# Altium PCB PCB2.PcbDoc
Units mm, origin at the board's own origin, x right, y up, seen from the top; angles counter-clockwise.
Board outline 75 x 68.33 mm, 2 copper layers (Top Layer, Bottom Layer); 27 components, 26 nets, 98 pads, 7 vias.
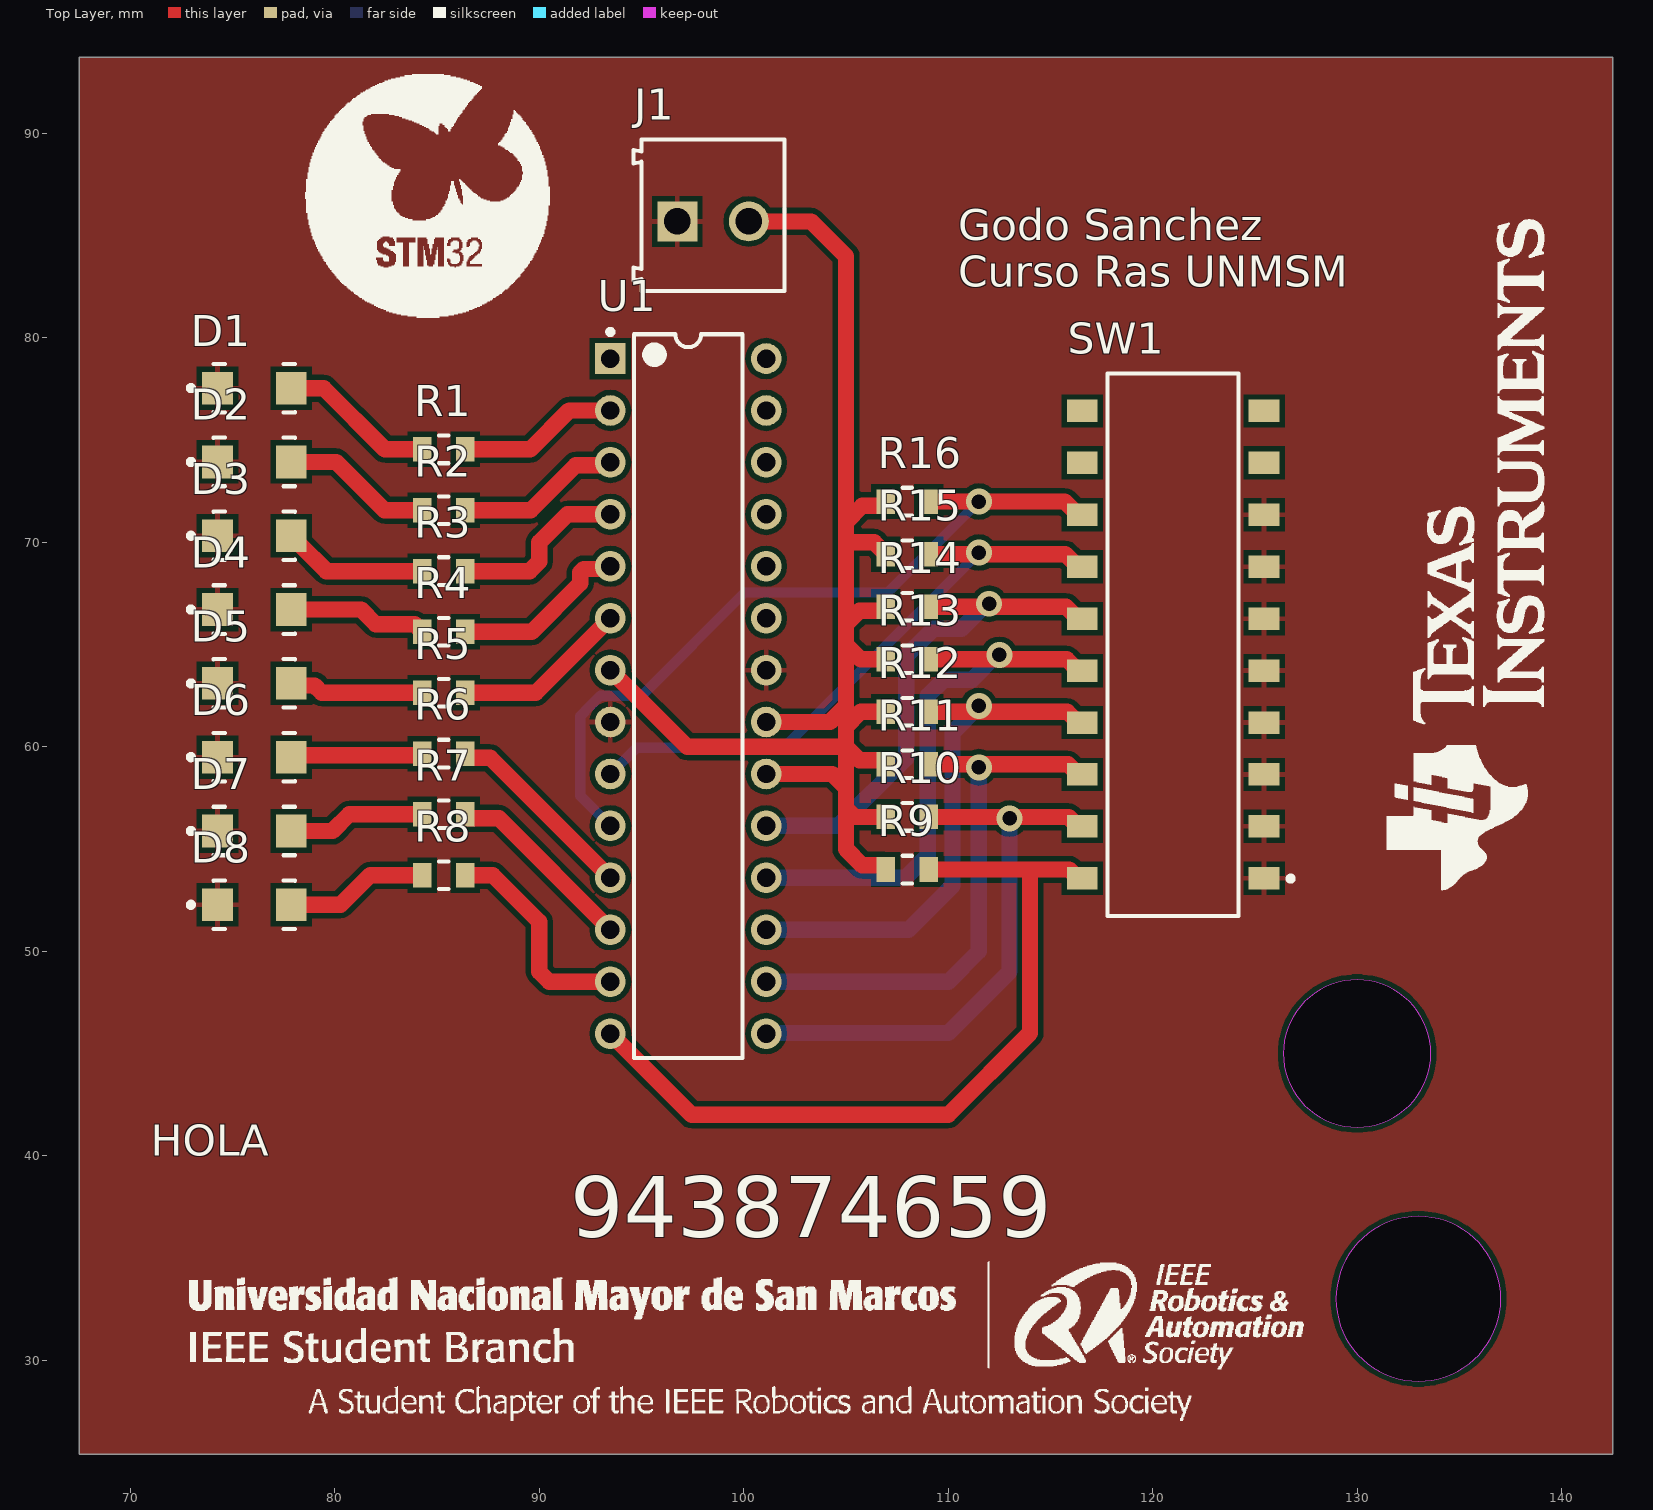
[diagram p0: Top Layer view]
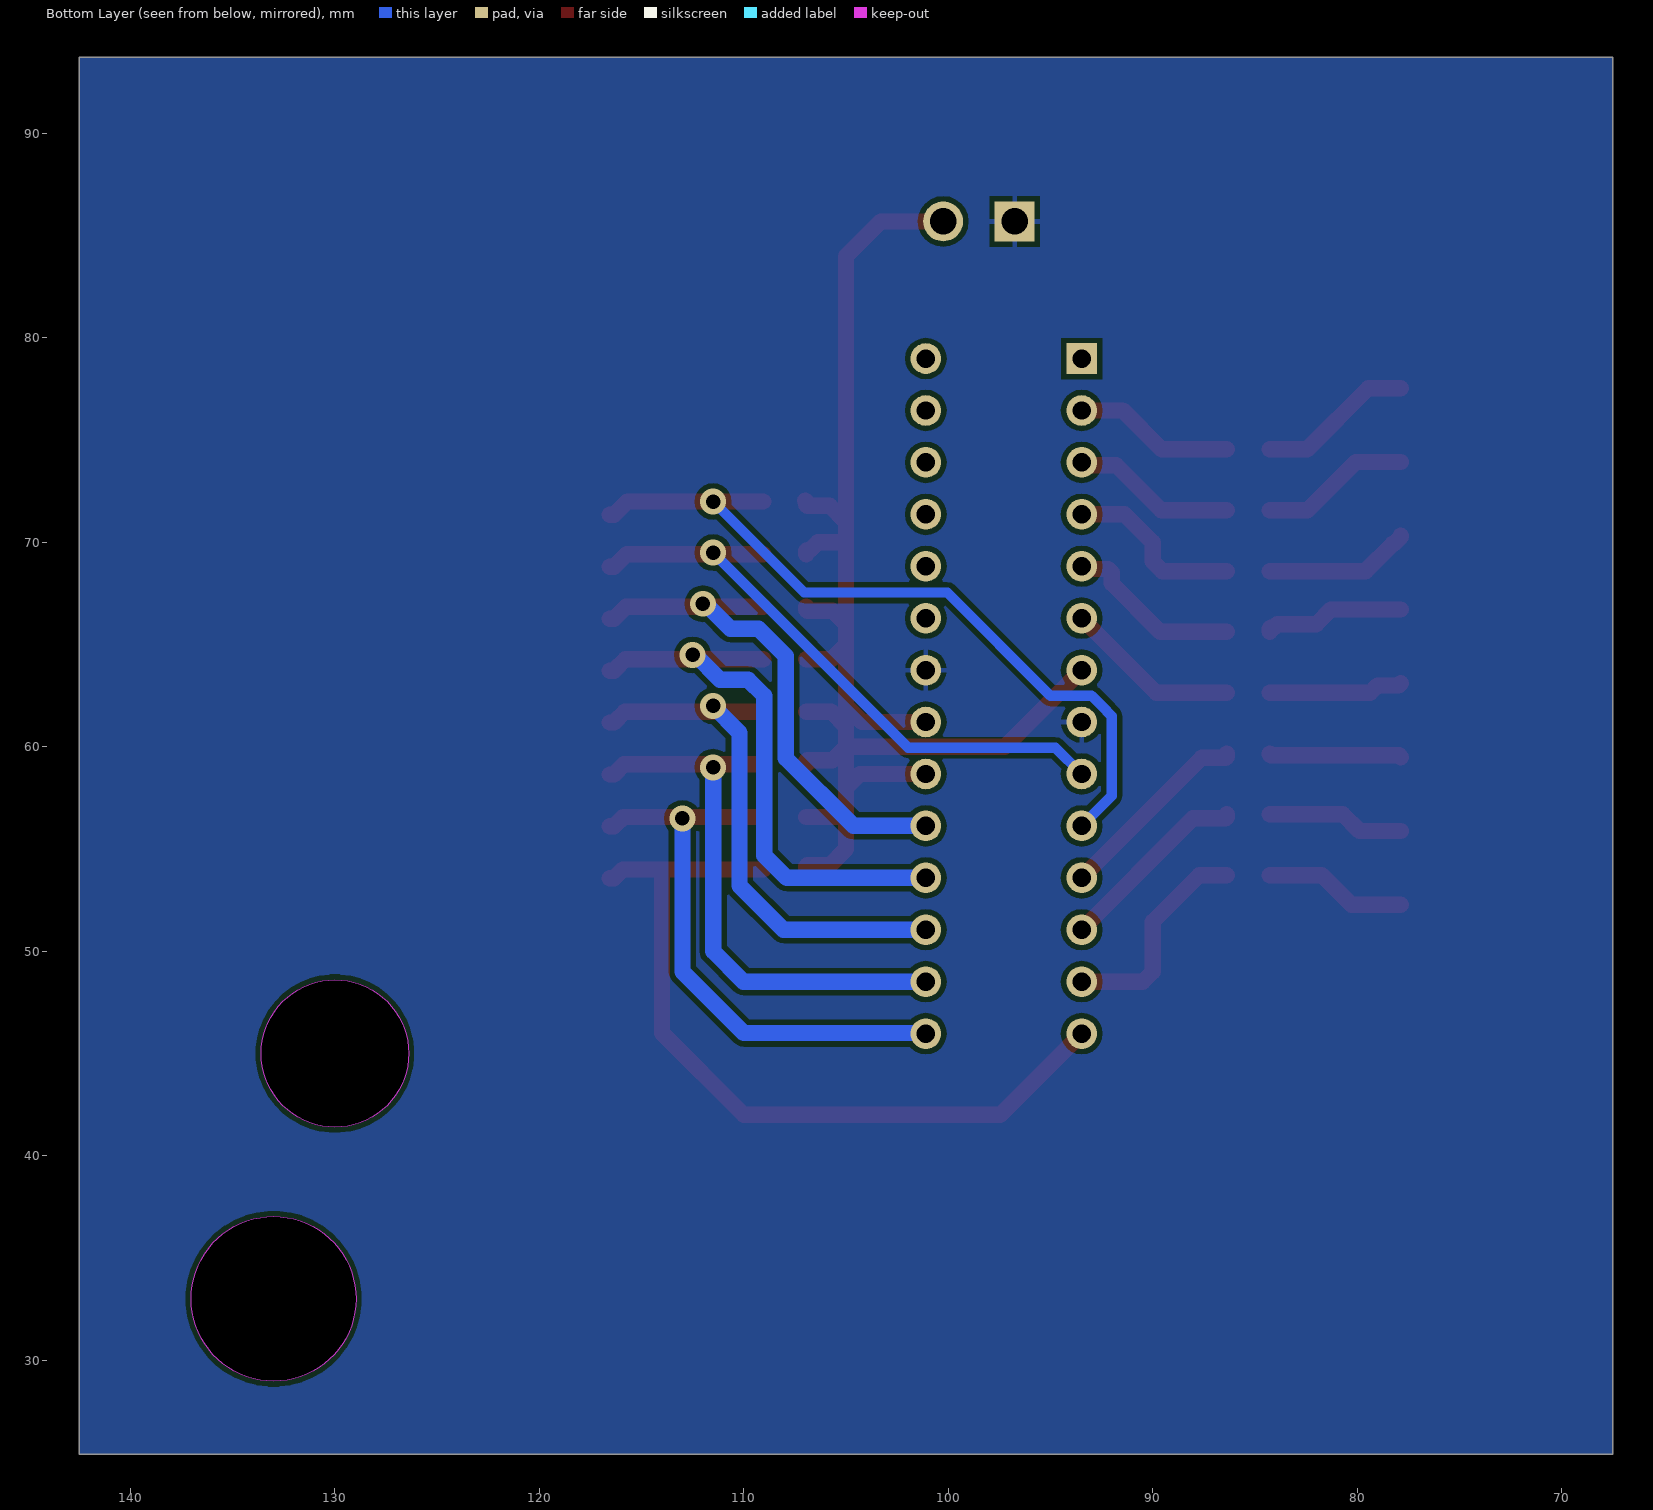
[diagram p1: Bottom Layer view, seen from below]
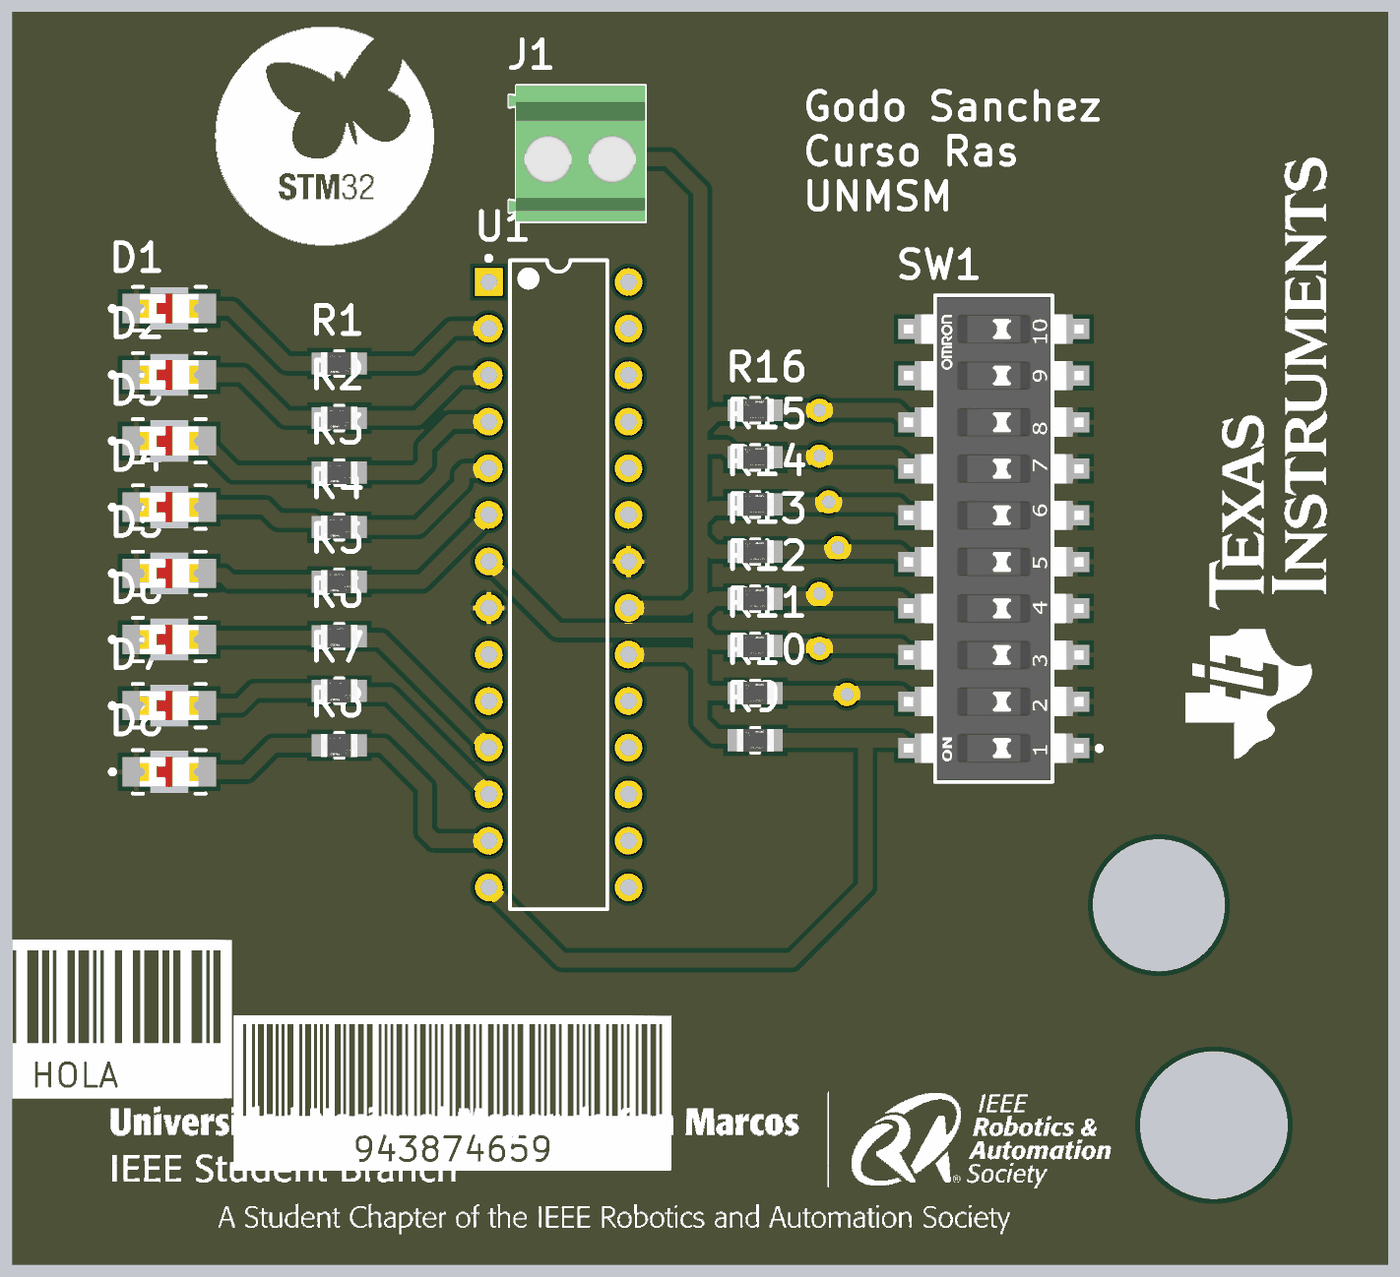
[diagram p2: 3D render of the assembled board from above, using the file's embedded part models]

## Layer stack, top to bottom
Top Solder: solder mask 0.0102, Solder Resist, Dk 3.5
Top Layer: signal copper 0.0356
Dielectric 1: dielectric 0.32, FR-4, Dk 4.8
Bottom Layer: signal copper 0.0356
Bottom Solder: solder mask 0.0102, Solder Resist, Dk 3.5

## Board outline
67.5,25.4 67.5,93.726 142.5,93.726 142.5,25.4
cut-out: 128.969,33 ccw(c133,33) 133,28.969 ccw(c133,33) 137.031,33 ccw(c133,33) 133,37.031 ccw(c133,33)
cut-out: 126.394,45 ccw(c130,45) 130,41.394 ccw(c130,45) 133.606,45 ccw(c130,45) 130,48.606 ccw(c130,45)

## Design rules (kind name [scope] priority, off if disabled: settings)
Clearance [All] p1: gap=0.254 ignorepadtopadclearanceinfootprint=FALSE except(0: Arc-Hole Track-Hole SMDPad-Hole THPad-Hole Via-Hole Fill-Hole Poly-Hole Region-Hole Text-Hole)
PolygonConnect [All] p1: connectstyle=Relief reliefconductorwidth=0.254 reliefentries=4 polygonreliefangle="90 Angle" airgapwidth=0.254
RoutingVias [All] p1: holewidth=0.711 width=1.27 viastyle="Through Hole" minholewidth=0.711 minwidth=1.27 maxholewidth=0.711 maxwidth=1.27
SolderMaskExpansion [All] p1: expansion=0.102 istentingtop=FALSE
Width [All] p1: maxlimit=1 minlimit=0.5 preferedwidth=0.8
30 further rules are at their usual default settings.

## Components (designator, comment, footprint, x,y, rotation, side; value= is the part's Value field where it differs from the comment)
D1 "LTST-C230KRKT" FP-LTST-C230KRKT-MFG 76.056,77.547 r0 top
D2 "LTST-C230KRKT" FP-LTST-C230KRKT-MFG 76.056,73.937 r0 top
D3 "LTST-C230KRKT" FP-LTST-C230KRKT-MFG 76.056,70.326 r0 top
D4 "LTST-C230KRKT" FP-LTST-C230KRKT-MFG 76.056,66.716 r0 top
D5 "LTST-C230KRKT" FP-LTST-C230KRKT-MFG 76.056,63.105 r0 top
D6 "LTST-C230KRKT" FP-LTST-C230KRKT-MFG 76.056,59.495 r0 top
D7 "LTST-C230KRKT" FP-LTST-C230KRKT-MFG 76.056,55.884 r0 top
D8 "LTST-C230KRKT" FP-LTST-C230KRKT-MFG 76.056,52.274 r0 top
J1 "691214110002" 691214110002 98.5,86 r0 top
R1 "RT0805BRD07249RL" FP-RT0805-MFG 85.325,74.549 r180 top value=249Ω
R2 "RT0805BRD07249RL" FP-RT0805-MFG 85.325,71.574 r180 top value=249Ω
R3 "RT0805BRD07249RL" FP-RT0805-MFG 85.325,68.598 r180 top value=249Ω
R4 "RT0805BRD07249RL" FP-RT0805-MFG 85.325,65.623 r180 top value=249Ω
R5 "RT0805BRD07249RL" FP-RT0805-MFG 85.325,62.647 r180 top value=249Ω
R6 "RT0805BRD07249RL" FP-RT0805-MFG 85.325,59.672 r180 top value=249Ω
R7 "RT0805BRD07249RL" FP-RT0805-MFG 85.325,56.696 r180 top value=249Ω
R8 "RT0805BRD07249RL" FP-RT0805-MFG 85.325,53.721 r180 top value=249Ω
R9 "RT0805BRD07249RL" FP-RT0805-MFG 108,54 r0 top value=249Ω
R10 "RT0805BRD07249RL" FP-RT0805-MFG 108,56.571 r0 top value=249Ω
R11 "RT0805BRD07249RL" FP-RT0805-MFG 108,59.143 r0 top value=249Ω
R12 "RT0805BRD07249RL" FP-RT0805-MFG 108,61.714 r0 top value=249Ω
R13 "RT0805BRD07249RL" FP-RT0805-MFG 108,64.286 r0 top value=249Ω
R14 "RT0805BRD07249RL" FP-RT0805-MFG 108,66.857 r0 top value=249Ω
R15 "RT0805BRD07249RL" FP-RT0805-MFG 108,69.429 r0 top value=249Ω
R16 "RT0805BRD07249RL" FP-RT0805-MFG 108,72 r0 top value=249Ω
SW1 "A6S-0102-PH" FP-A6S-0102-PH-MFG 121,65 r90 top
U1 "ATmega328-PU" 28P3 97.282,62.484 r0 top

## Footprints (in the part's own frame and the unit in brackets; to place one, negate y for a bottom-side part, rotate by r counter-clockwise, add the part's x,y. Pads: shape width x height; smd on the part's side, far side on the other; paste and mask are expansions set on the pad)
28P3 [mm] "28-Pin Plastic Dual In-Line Package (PDIP)"
  rect 1.5x1.5 hole 0.9: 1(-3.81,16.51)
  round 1.5 hole 0.9: 2(-3.81,13.97) 3(-3.81,11.43) 4(-3.81,8.89) 5(-3.81,6.35) 6(-3.81,3.81) 7(-3.81,1.27) 8(-3.81,-1.27) 9(-3.81,-3.81) 10(-3.81,-6.35) 11(-3.81,-8.89) 12(-3.81,-11.43) 13(-3.81,-13.97) 14(-3.81,-16.51) 15(3.81,-16.51) 16(3.81,-13.97) 17(3.81,-11.43) 18(3.81,-8.89) 19(3.81,-6.35) 20(3.81,-3.81) 21(3.81,-1.27) 22(3.81,1.27) 23(3.81,3.81) 24(3.81,6.35) 25(3.81,8.89) 26(3.81,11.43) 27(3.81,13.97) 28(3.81,16.51)
  silkscreen extent -3.93,-17.7 2.65,17.93, body extent -3.6,-17.65 3.6,17.65, height 4.58
691214110002 [mm] "3.50 mm Horizontal Entry Modular, 2p"
  rect 1.95x1.95 hole 1.3: 1(-1.75,-0.3)
  round 1.95 hole 1.3: 2(1.75,-0.3)
  silkscreen extent -3.9,-3.7 3.5,3.7, body extent -3.95,-3.7 3.5,3.7, height 8.55
FP-A6S-0102-PH-MFG [mm]
  rect 1.1x1.5 smd paste+0 mask+0: 1(-11.43,-4.45) 2(-8.89,-4.45) 3(-6.35,-4.45) 4(-3.81,-4.45) 5(-1.27,-4.45) 6(1.27,-4.45) 7(3.81,-4.45) 8(6.35,-4.45) 9(8.89,-4.45) 10(11.43,-4.45) 11(11.43,4.45) 12(8.89,4.45) 13(6.35,4.45) 14(3.81,4.45) 15(1.27,4.45) 16(-1.27,4.45) 17(-3.81,4.45) 18(-6.35,4.45) 19(-8.89,4.45) 20(-11.43,4.45)
  silkscreen extent -13.27,-5.88 13.27,3.2, body extent -13.37,-5.3 13.37,5.3, height 0.25
FP-LTST-C230KRKT-MFG [mm]
  rect 1.5x1.6 smd paste+0 mask+0: 1(-1.8,0) 2(1.8,0)
  silkscreen extent -3.22,-1.19 1.99,1.19, body extent -2.65,-0.95 2.65,0.95, height 0.25
FP-RT0805-MFG [mm]
  rect 0.9x1.2 smd paste+0 mask+0: 1(-1.05,0) 2(1.05,0)
  silkscreen extent -0.23,-0.67 0.23,0.67, body extent -1.6,-0.77 1.6,0.77, height 0.25

## Part data
D1 D2 D3 D4 D5 D6 D7 D8: library part CMP-22017-000041-1, "LED RED CLEAR CHIP SMD", Case Code (Imperial)=1206, Case Code (Metric)=3216, Color=Red, Forward Current=30mA, Forward Voltage=2V, Lens Color=Colorless, Max Operating Temperature=85°C, Min Operating Temperature=-55°C, Package Quantity=1, Power Dissipation=75mW, Reverse Voltage=5V, Test Current=20mA, Case/Package=1206, Depth=1.6mm, Dominant Wavelength=631nm, Height=1.1mm, Illumination Color=Red, Lead Free="Lead Free", Length=3.2mm, Lens Style=Diffused, Lens Transparency=Clear, Luminous Intensity=54mcd, Mount="Surface Mount", Number of Elements=1, Number of LEDs=1, Number of Pins=2, Packaging="Tape and Reel", Power Rating=75mW, Radiation Hardening=No, RoHS Compliant=Yes, Viewing Angle=130°, Wavelength=639nm, Width=1.6mm
J1: library part CMP-1502-02464-1, "Serie 2141 - 3.50 mm Horizontal Entry Modular with Rising Cage Clamp WR-TBL, 2 pin", Manufacturer="Wurth Elektronik", Operating Temperature=-40to105degC, Datasheet URL=http://katalog.we-online.de/em/datasheet/6912141100xx.pdf, Manufacturer URL=http://www.we-online.de, Mounting Technology=THT, Package Reference=691214110002, Packaging=Box, Part Number=691214110002, Pin Number=2, Pitch=3.50mm, Publisher=WurthElektronik
R1 R2 R3 R4 R5 R6 R7 R8 R9 R10 R11 R12 R13 R14 R15 R16: library part CMP-03412-035801-1, "RES SMD 249 OHM 0.1% 1/8W 0805", Manufacturer=Yageo, Package=RT0805, Power Rating=0.125W, Resistance=249Ω, Temperature="-55°C to +155°C", Temperature Coefficient="25 ppm/°C", Temperature Range High=+155°C, Temperature Range Low=-55°C, Tolerance=0.0025, Voltage Rating=150V, Automotive=No, Category=Res, ComponentLink2Description=Datasheet, ComponentLink2URL=http://www.yageo.com/documents/recent/PYu-RT_1-to-0.01_RoHS_L_9.pdf, Composition="Thin Film", Device Class L1="Passive Components", Device Class L2=Resistors, Device Class L3="Chip SMD Resistors", Digikey Description="RES SMD 249 OHM 0.1% 1/8W 0805", Footprint Url=http://www.yageo.com/exep/pages/download/literatures/PYu-R_Mount_10.pdf, Height=0.6mm, Ipc Land Pattern Name=RESC200125X50, Lead Free=Yes, Manufacturer Part Number=RT0805BRD07249RL, Mouser Description="Res SMD 249 Ohm .1% 0805", Octopart=https://octopart.com/rt0805brd07249rl-yageo-1410573, RoHS=TRUE, Series=RT
SW1: library part CMP-08827-000074-1, "SWITCH SLIDE DIP SPST 25MA 24V", Case/Package=DIP, Contact Resistance=200mR, Current Rating=25mA, Max Operating Temperature=70°C, Max Voltage Rating (DC)=24V, Min Operating Temperature=-20°C, Package Quantity=900, Actuator Length=0mm, Actuator Type="Slide (Standard)", Contact Plating=Gold, Electrical Life=1000Cycles, Length=1.037inch, Max Current Rating=25mA, Mechanical Life=1000Cycles, Mount="Surface Mount", Number of Positions=10, Orientation=Straight, Packaging="Tape and Reel", Pitch=0.1inch, Radiation Hardening=No, RoHS Compliant=Yes, Series=A6S-H, Terminal Pitch=2.54mm, Termination="Gull Wing", Throw Configuration=SPST, Voltage Rating (DC)=24V, Washable=Yes, Weight=0.87g
U1: library part CMP-0095-00015-2, "8-bit AVR Microcontroller, 32KB Flash, 1KB EEPROM, 2KB SRAM, 28-pin PDIP, Industrial Grade (-40°C to 85°C)", ComponentLink1Description="Manufacturer URL", ComponentLink1URL=http://www.atmel.com/, ComponentLink2Description="ATmega48A/48PA/88A/88PA/168A/168PA/328/328P Datasheet", ComponentLink2URL=http://www.atmel.com/dyn/resources/prod_documents/8271.pdf, ComponentLink3Description="ATmega48A/48PA/88A/88PA/168A/168PA/328/328P Summary", ComponentLink3URL=http://www.atmel.com/dyn/resources/prod_documents/8271S.pdf, DatasheetVersion="revD, May-2011", PackageDescription="28-lead (0.300\"/7.62mm Wide) Plastic Dual Inline Package (PDIP)", PackageReference=28P3, PackageVersion="revB, Sep-2001", RevisionNote="DatasheetVersion updated. URLs added."

## Via types
v1: diameter 1.27, hole 0.711, Top Layer to Bottom Layer, 7 vias

## Nets (pads, with @x,y where several pads share a name; then routed paths per layer and width w, separated by ;. In a path a pad name is that pad's centre, name@x,y a point inside that pad or via, vN(x,y) a via of type N, cw(c..) or ccw(c..) an arc to the next point about the centre after c; other vN are vias at no path point)
GND: D1.1 D2.1 D3.1 D4.1 D5.1 D6.1 D7.1 D8.1 J1.1 SW1.1 SW1.2 SW1.3 SW1.4 SW1.5 SW1.6 SW1.7 SW1.8 U1.8 U1.22
In0: R9.2 SW1.20 U1.14 | length 39.5
  Top Layer w0.8: U1.14 97.446,42 110,42 114,46 114,54 ; R9.2 114,54 ; SW1.20 116.35,53.57 115.92,54 114,54
In1: R10.2 SW1.19 U1.15 | length 28.4
  Top Layer w0.8: R10.2 115.889,56.571 116.35,56.11 SW1.19
  Bottom Layer w0.8: U1.15 101.118,46 110,46 113,49 v1(113,56.5)
In2: R11.2 SW1.18 U1.16 | length 27.7
  Top Layer w0.8: R11.2 115.857,59.143 116.35,58.65 SW1.18
  Bottom Layer w0.8: U1.16 110.014,48.514 111.5,50 v1(111.5,59)
In3: R12.2 SW1.17 U1.17 | length 27.1
  Top Layer w0.8: R12.2 115.826,61.714 116.35,61.19 SW1.17
  Bottom Layer w0.8: U1.17 108.054,51.054 110.211,53.211 110.211,60.694 111.5,61.983 v1(111.5,62)
In4: R13.2 SW1.16 U1.18 | length 28.2
  Top Layer w0.8: R13.2 115.794,64.286 116.35,63.73 SW1.16
  Bottom Layer w0.8: U1.18 107.906,53.594 109,54.688 109,62.5 109.789,63.289 111.162,63.289 112.373,64.5 v1(112.5,64.5)
In5: R14.2 SW1.15 U1.19 | length 26.1
  Top Layer w0.8: R14.2 115.763,66.857 116.35,66.27 SW1.15
  Bottom Layer w0.8: U1.19 104.634,56.134 107.946,59.446 107.946,64.446 109.279,65.779 110.652,65.779 111.873,67 v1(112,67)
In6: R15.2 SW1.14 U1.9 | length 30.3
  Top Layer w0.8: R15.2 115.731,69.429 116.35,68.81 SW1.14
  Bottom Layer w0.5: U1.9 94.758,59.96 101.96,59.96 v1(111.5,69.5)
In7: R16.2 SW1.13 U1.10 | length 37.6
  Top Layer w0.8: R16.2 115.7,72 116.35,71.35 SW1.13
  Bottom Layer w0.5: U1.10 92,57.606 92,61.5 92.218,61.718 92.218,61.733 92.985,62.5 95,62.5 100.048,67.548 107.048,67.548 v1(111.5,72)
NetD1_2: D1.2 R1.2 | length 7.7
  Top Layer w0.8: D1.2 79.453,77.547 82.451,74.549 R1.2
NetD2_2: D2.2 R2.2 | length 7.4
  Top Layer w0.8: D2.2 80.063,73.937 82.426,71.574 R2.2
NetD3_2: D3.2 R3.2 | length 7.2
  Top Layer w0.8: D3.2 77.856,70.276 78.206,69.926 78.256,69.926 79.584,68.598 R3.2
NetD4_2: D4.2 R4.2 | length 7
  Top Layer w0.8: D4.2 81.284,66.716 82,66 83.898,66 84.075,65.823 84.225,65.823 84.275,65.773 R4.2
NetD5_2: D5.2 R5.2 | length 6.6
  Top Layer w0.8: D5.2 77.961,63 79,63 79.353,62.647 R5.2
NetD6_2: D6.2 R6.2 | length 6.5
  Top Layer w0.8: D6.2 77.944,59.583 84.225,59.583 84.275,59.633 R6.2
NetD7_2: D7.2 R7.2 | length 6.8
  Top Layer w0.8: D7.2 79.884,55.884 80.696,56.696 R7.2
NetD8_2: D8.2 R8.2 | length 7
  Top Layer w0.8: D8.2 80.274,52.274 81.721,53.721 R8.2
Out0: R1.1 U1.2 | length 7.9
  Top Layer w0.8: R1.1 89.549,74.549 91.454,76.454 U1.2
Out1: R2.1 U1.3 | length 8.1
  Top Layer w0.8: R2.1 89.574,71.574 91.78,73.78 93.338,73.78 U1.3
Out2: R3.1 U1.4 | length 8.8
  Top Layer w0.8: R3.1 89.531,68.598 90,69.067 90,70 91.374,71.374 U1.4
Out3: R4.1 U1.5 | length 8.7
  Top Layer w0.8: R4.1 89.623,65.623 92,68 92,68.531 92.169,68.7 93.338,68.7 U1.5
Out4: R5.1 U1.6 | length 8.6
  Top Layer w0.8: R5.1 89.825,62.647 U1.6
Out5: R6.1 U1.11 | length 9.7
  Top Layer w0.8: R6.1 86.375,59.522 86.425,59.472 87.594,59.472 U1.11
Out6: R7.1 U1.12 | length 9.5
  Top Layer w0.8: R7.1 86.375,56.551 86.425,56.501 88.025,56.501 U1.12
Out7: R8.1 U1.13 | length 10.7
  Top Layer w0.8: R8.1 87.721,53.721 90,51.442 90,49 90.486,48.514 U1.13
VCC: J1.2 R9.1 R10.1 R11.1 R12.1 R13.1 R14.1 R15.1 R16.1 U1.7 U1.20 U1.21 | length 75.1
  Top Layer w0.8: U1.7 97.226,60 105,60 ; J1.2@99.75,85.7 103.3,85.7 105,84 105,71 ; U1.20 104.326,58.674 105,58 ; U1.21 104.214,61.214 105,62 ; R9.1 106.95,54.15 106.9,54.2 105.8,54.2 105,55 105,57 ; R10.1 105.429,56.571 105,57 ; R11.1 106.95,59.293 106.9,59.343 105.657,59.343 105,60 ; R12.1 105.714,61.714 105,61 ; R13.1 105.714,64.286 105,65 ; R14.1 106.95,66.707 106.9,66.657 105.657,66.657 105,66 ; R15.1 106.95,69.579 106.9,69.629 106.75,69.629 106.379,70 105,70 ; R16.1@107,72.05 R16.1 106.95,71.85 106.9,71.8 105.8,71.8 105,71 ; 105,57 105,58 ; 105,58 105,60 ; 105,60 105,61 ; 105,61 105,62 ; 105,62 105,65 ; 105,65 105,66 ; 105,66 105,70 ; 105,70 105,71
pads on no net: SW1.9 SW1.10 SW1.11 SW1.12 U1.1 U1.23 U1.24 U1.25 U1.26 U1.27 U1.28

## Polygon pours and split planes (outlines as drawn)
GND on Top Layer "GND_L01_P000" (solid, pour order 0): 67.5,25.4 67.5,93.726 142.5,93.726 142.5,25.4
GND on Bottom Layer "GND_L02_P001" (solid, pour order 1): 67.5,25.4 67.5,93.726 142.5,93.726 142.5,25.4

## Silkscreen, mask and mechanical layers (free items; w line width, h text height)
Top Overlay:
  drawing of 175 lines, arcs and shapes, not listed
  text "Godo Sanchez / Curso Ras UNMSM" at 110.5,82.5 h1.52
  text "HOLA" at 71,40 h1.52
  text "943874659" at 91.5,36 h3
Mechanical 1:
  circle w0.254: c133,33 r4.031
  circle w0.254: c130,45 r3.606
  lines w1.2: 67.5,25.4 67.5,93.726 142.5,93.726 142.5,25.4 67.5,25.4